# Altium PCB Light interrupter.PcbDoc
Units mm, origin at the board's own origin, x right, y up, seen from the top; angles counter-clockwise.
Board outline 23.5 x 8.4 mm, 2 copper layers (Top Layer, Bottom Layer), stack 1.07 mm thick; 4 components, 4 nets, 11 pads, 0 vias.
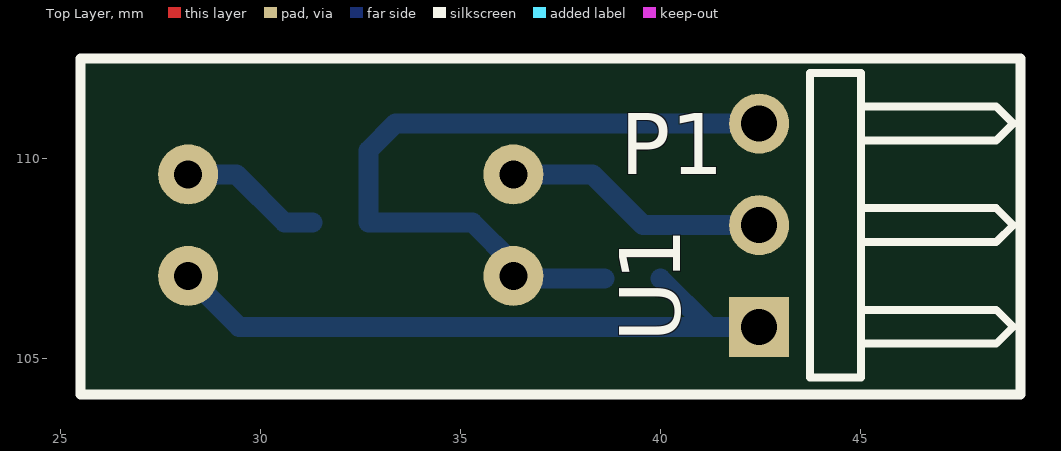
[diagram p0: Top Layer view]
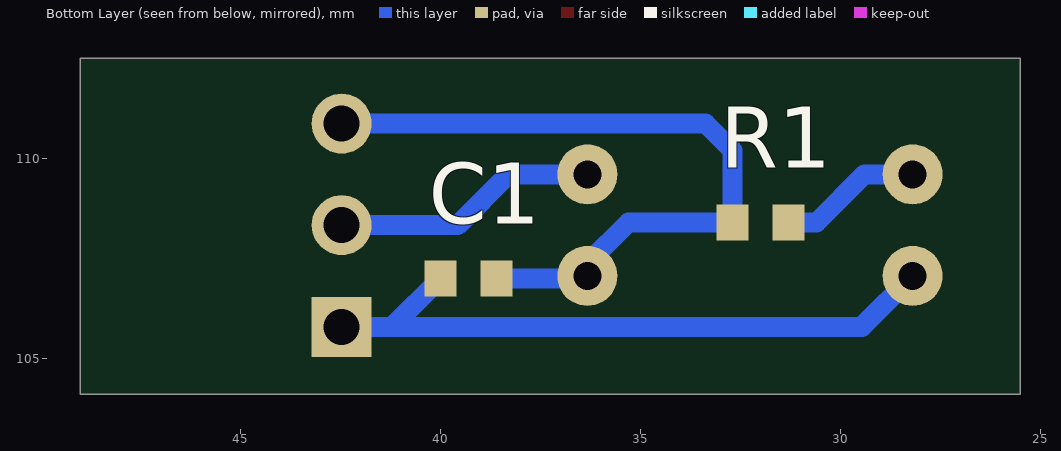
[diagram p1: Bottom Layer view, seen from below]

## Layer stack, top to bottom
Top Solder: solder mask 0.025, Solder Resist, Dk 3.5
Top Layer: signal copper 0.035
Dielectric 1: dielectric 1, FR-4, Dk 4.8
Bottom Layer: signal copper 0.035
Bottom Solder: solder mask 0.025, Solder Resist, Dk 3.5

## Board outline
25.5,104.1 49,104.1 49,112.5 25.5,112.5

## Design rules (kind name [scope] priority, off if disabled: settings)
Clearance [All] p1: gap=0.25 ignorepadtopadclearanceinfootprint=FALSE
PolygonConnect [All] p1: connectstyle=Relief reliefconductorwidth=0.254 reliefentries=4 polygonreliefangle="90 Angle" airgapwidth=0.254
RoutingVias [All] p1: holewidth=0.711 width=1.27 viastyle="Through Hole" minholewidth=0.711 minwidth=1.27 maxholewidth=0.711 maxwidth=1.27
SolderMaskExpansion [All] p1: expansion=0.102
Width [All] p1: maxlimit=0.6 minlimit=0.2 preferedwidth=0.5
30 further rules are at their usual default settings.

## Components (designator, comment, footprint, x,y, rotation, side; value= is the part's Value field where it differs from the comment)
C1 "" 1608[0603] 39.3,107 r180 bottom value=22uF
P1 "Header 3H" HDR1X3H 42.469,105.791 r90 top
R1 "" 1608[0603] 32,108.4 r180 bottom value=330
U1 "OPB840L51" OPB840L51_Housing 28.194,107.061 r0 top

## Footprints (in the part's own frame and the unit in brackets; to place one, negate y for a bottom-side part, rotate by r counter-clockwise, add the part's x,y. Pads: shape width x height; smd on the part's side, far side on the other; paste and mask are expansions set on the pad)
1608[0603] [mm] "Chip Capacitor, Body 1.6x0.8mm, IPC High Density"
  rect 0.8x0.9 smd: 1(-0.7,0) 2(0.7,0)
  body extent -0.87,-0.48 0.87,0.48, height 1.3
HDR1X3H [mm] "Connector; Header; 3 Position; Right Angle"
  rect 1.5x1.5 hole 0.9: 1(0,0)
  round 1.5 hole 0.9: 2(2.54,0) 3(5.08,0)
  silkscreen extent -1.27,-6.35 6.35,-1.27
OPB840L51_Housing [mm]
  round 1.5 hole 0.7: 1(0,0) 2(0,2.54) 3(8.13,0) 4(8.13,2.54)
  body extent -2.73,-10.31 10.22,12.84, height 10.54

## Part data
C1: library part Cap, "Capacitor", LatestRevisionDate=17-Jul-2002, LatestRevisionNote="Re-released for DXP Platform.", PackageDescription="Radial Cap, Thru-Hole; 2 Leads; 0.3 in Pin Spacing", PackageReference=RAD-0.3, Published=8-Jun-2000, Publisher="Altium Limited"
P1: "Header, 3-Pin, Right Angle", LatestRevisionDate=17-Jul-2002, LatestRevisionNote="Re-released for DXP Platform.", Publisher="Altium Limited"
R1: library part "Res Semi", "Semiconductor Resistor", LatestRevisionDate=17-Jul-2002, LatestRevisionNote="Re-released for DXP Platform.", PackageDescription="Axial Device, Thru-Hole; 2 Leads; 0.5 in Pin Spacing", PackageReference=AXIAL-0.5, Published=8-Jun-2000, Publisher="Altium Limited"
U1: "Slotted Optical Switch, TT electronics"

## Nets (pads, with @x,y where several pads share a name; then routed paths per layer and width w, separated by ;. In a path a pad name is that pad's centre, name@x,y a point inside that pad or via, vN(x,y) a via of type N, cw(c..) or ccw(c..) an arc to the next point about the centre after c; other vN are vias at no path point)
GND: C1.1 P1.1 U1.1 | length 16.5
  Bottom Layer w0.5: U1.1 29.464,105.791 41.209,105.791 ; C1.1 41.209,105.791 ; P1.1 41.209,105.791
NetP1_2: P1.2 U1.4 | length 6.7
  Bottom Layer w0.5: U1.4 38.299,109.601 39.569,108.331 P1.2
NetR1_2: R1.2 U1.2 | length 3.6
  Bottom Layer w0.5: U1.2 29.399,109.601 30.6,108.4 R1.2
VCC: C1.2 P1.3 R1.1 U1.3 | length 18.5
  Bottom Layer w0.5: C1.2 36.385,107 U1.3 36.324,107.376 35.3,108.4 R1.1 32.7,110.2 33.371,110.871 P1.3

## Silkscreen, mask and mechanical layers (free items; w line width, h text height)
Top Overlay:
  lines w0.254: 43.9,104.1 44.6,104.1 48.5,104.1 ; 48.5,104.1 49,104.1 49,112.5 25.5,112.5 25.5,104.1 48.5,104.1